# Altium PCB 100871.pcbdoc (part 2 of 2)
Units mm, origin at the board's own origin, x right, y up, seen from the top; angles counter-clockwise.
Board outline 100 x 40 mm, 2 copper layers (Top Layer, Bottom Layer), stack 1.551 mm thick; 101 components, 40 nets, 215 pads, 100 vias.
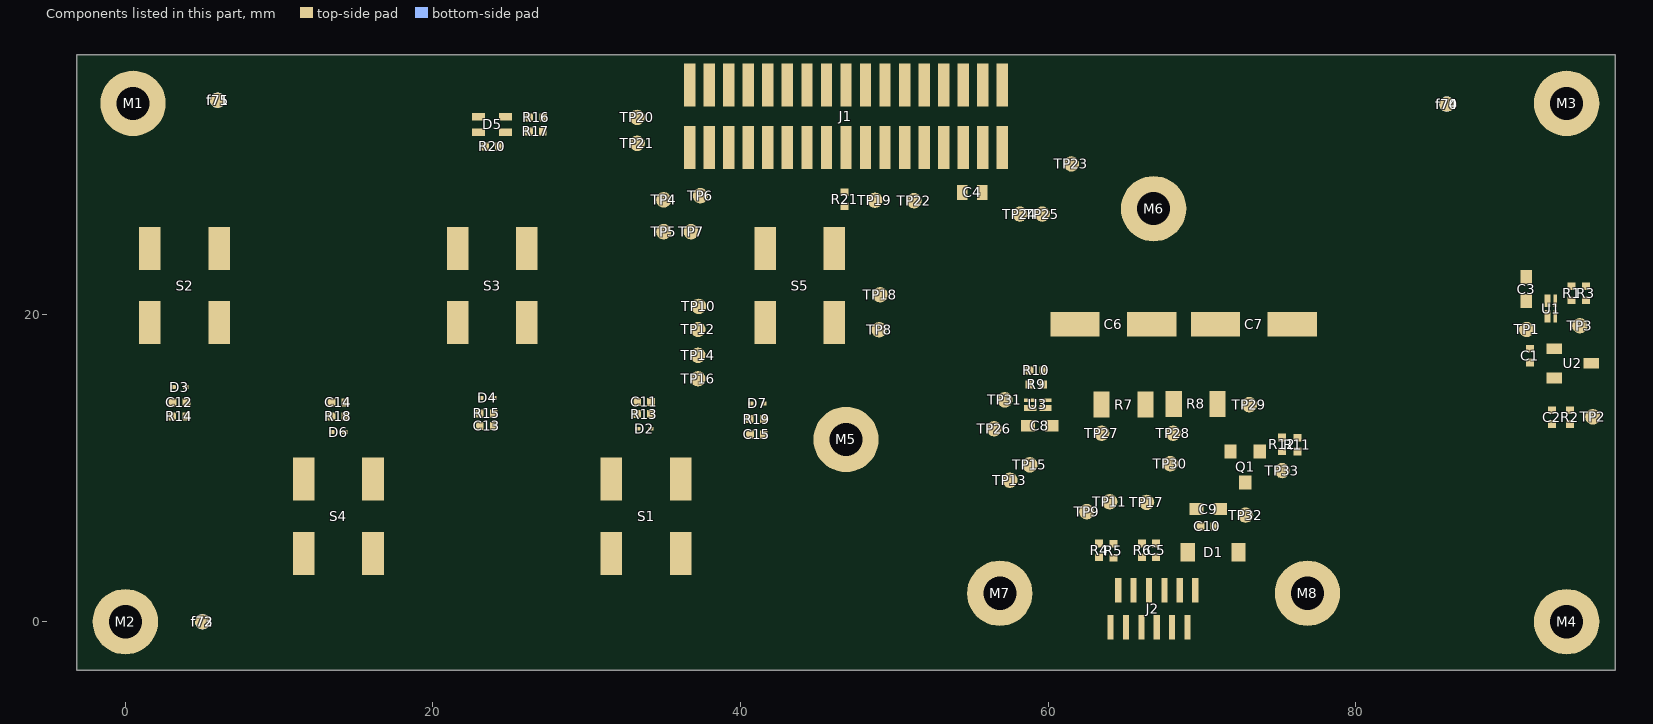
[diagram p2: the components of this part, seen from the top]

## Silkscreen, mask and mechanical layers (free items; w line width, h text height) (continued)
ASY_DWG:
  circle w0.38: c188.963,-106.972 r0.829
  lines w0.3: 199.22,-116.52 199.22,-56.52 ; 199.22,-102.52 279.22,-102.52 ; 199.22,-89.52 279.22,-89.52 ; 199.22,-76.52 279.22,-76.52 420.22,-76.52 ; 199.22,-63.52 279.22,-63.52 ; 230.22,355.48 420.22,355.48 ; 230.545,362.572 230.22,362.48 420.22,362.48 ; 230.545,377.572 230.22,377.48 420.22,377.48 ; 244.22,348.48 244.22,377.48 ; 249.22,-116.52 249.22,-56.52 ; 279.22,-116.52 279.22,-56.52 ; 279.22,-110.52 420.22,-110.52 ; 279.22,-94.52 419.22,-94.52 ; 292.22,-110.52 292.22,-94.52 ; 369.22,348.48 369.22,377.48 ; 388.22,-110.52 388.22,-94.52 ; 400.22,348.48 400.22,377.48
  lines w0.38: 174.22,-102.52 176.22,-102.52 ; 174.22,-100.52 176.22,-100.52 ; 174.22,-95.52 176.22,-95.52 ; 174.22,-93.52 176.22,-93.52 ; 175.22,-101.52 175.22,-99.52 ; 175.22,-94.52 175.22,-92.52 ; 180.22,-109.52 182.22,-109.52 ; 180.22,-107.52 182.22,-107.52 ; 181.22,-108.52 181.22,-106.52
  lines w0.508: 200.242,384.684 200.242,397.638 ; 200.242,384.684 200.242,397.638 ; 200.242,384.684 200.242,397.638 ; -370.369,8.129 -351.065,8.129 -370.369,8.129 ; -370.369,8.586 -351.065,8.586 -370.369,8.586 ; -370.369,133.528 -351.065,133.528 -370.369,133.528 ; -370.369,133.986 -351.065,133.986 -370.369,133.986 ; -370.369,258.928 -351.065,258.928 -370.369,258.928 ; -370.369,259.385 -351.065,259.385 -370.369,259.385 ; -241.133,-129.971 -241.133,-117.017 -241.133,-129.971 ; -241.133,384.684 -241.133,397.638 -241.133,384.684 ; -240.676,-129.971 -240.676,-117.017 -240.676,-129.971 ; -240.676,384.684 -240.676,397.638 -240.676,384.684 ; -130.923,-129.971 -130.923,-117.017 -130.923,-129.971 ; -130.923,384.684 -130.923,397.638 -130.923,384.684 ; -130.466,-129.971 -130.466,-117.017 -130.466,-129.971 ; -130.466,384.684 -130.466,397.638 -130.466,384.684 ; -20.687,-129.971 -20.687,-117.017 -20.687,-129.971 ; -20.687,384.684 -20.687,397.638 -20.687,384.684 ; -20.23,-129.971 -20.23,-117.017 -20.23,-129.971 ; -20.23,384.684 -20.23,397.638 -20.23,384.684 ; 89.575,384.684 89.575,397.638 89.575,384.684 ; 90.032,384.684 90.032,397.638 90.032,384.684 ; 199.785,384.684 199.785,397.638 199.785,384.684 ; 309.996,384.938 309.996,397.638 309.996,384.938 ; 310.021,-129.971 310.021,-117.017 310.021,-129.971 ; 310.453,384.684 310.453,397.638 310.453,384.684 ; 310.478,-129.971 310.478,-117.017 310.478,-129.971 ; 420.46,8.129 439.764,8.129 420.46,8.129 ; 420.46,8.586 439.764,8.586 420.46,8.586 ; 420.46,133.554 439.764,133.554 420.46,133.554 ; 420.46,134.011 439.764,134.011 420.46,134.011 ; 420.46,258.979 439.764,258.979 420.46,258.979 ; 420.46,259.436 439.764,259.436 420.46,259.436
  lines w1: -350.78,-116.52 -350.78,384.48 420.22,384.48 420.22,-116.52 -350.78,-116.52
  lines w1.1: 90.22,-129.52 90.22,-116.52 ; 104.22,-116.52 104.22,-76.52 155.22,-76.52 ; 155.22,-116.52 155.22,-76.52 ; 199.22,-129.52 199.22,-116.52 ; 230.22,348.48 230.22,384.48 ; 230.22,369.48 420.22,369.48 ; 279.22,-56.52 155.22,-56.52 155.22,-76.52
  text "1" at 363.056,388.468 h7.62
  text "6" at -188.276,388.29 h7.62
  text "5" at -77.684,388.214 h7.62
  text "7" at -298.207,388.163 h7.62
  text "4" at 31.917,388.062 h7.62
  text "3" at 142.686,388.062 h7.62
  text "2" at 252.719,388.062 h7.62
  text "REVISIONS" at 317.076,379.48 h2.54
  text "REV" at 234.784,372.48 h2.03
  text "DESCRIPTION" at 289.288,372.48 h2.03
  text "DATE" at 380.972,372.48 h2.03
  text "APRVD" at 406.16,372.48 h2.03
  text "NOTES: UNLESS OTHERWISE SPECIFIED" at -338.655,372.38 h2.03
  text "1   RoHS COMPLIANT ASSEMBLY REQUIRED. ASSEMBLE PER IPC-A-610, CLASS 2," at -338.555,365.88 h2.03
  text "01" at 235.188,364.48 h2.54
  text "INITIAL RELEASE" at 246.22,364.48 h2.54
  text "08/08/2016" at 375.06,364.48 h2.54
  text "2   AQUEOUS BASED CLEANING AFTER SOLDER FOR ALL COMPONENTS IS PREFERRED, NO-CLEAN" at -338.461,360.675 h2.03
  text "02" at 235.388,357.98 h2.54
  text "ALPHA 2 RELEASE" at 246.42,357.98 h2.54
  text "09/16/2016" at 375.26,357.98 h2.54
  text "RoHS SOLDER PROCESS IS ACCEPTABLE." at -338.605,356.53 h2.03
  text "3   ITEM IDENTIFICATION: MARK REVISION NUMBER OF THIS DRAWING IN THE SPACE PROVIDED." at -338.78,350.73 h2.03
  text "D" at 424.905,318.796 h7.62
  text "D" at -359.777,318.644 h7.62
  text "C" at 424.905,193.345 h7.62
  text "C" at -359.904,193.142 h7.62
  text "B" at -359.675,67.742 h7.62
  text "B" at 425.032,67.742 h7.62
  text "ASSEMBLY TOP" at 12.904,-16.495 h3.81
  text "A" at 424.778,-58.013 h7.62
  text "A" at -359.929,-58.14 h7.62
  text "APPROVALS" at 216.912,-61.52 h2.03
  text "DATE" at 259.972,-61.52 h2.03
  text "UNLESS OTHERWISE" at 160.964,-63.52 h2.54
  text "DESIGNER" at 200.22,-67.52 h2.03
  text "SPECIFIED" at 168.076,-68.52 h2.54
  text "DIMENSIONS ARE" at 162.996,-73.52 h2.54
  text "09/16/2016" at 254.06,-73.52 h2.54
  text "PRICE" at 202.132,-73.595 h2.54
  text "1511 Sixth Ave. Suite 300, Seattle, WA 98101 206.381.0898" at 291.308,-74.52 h2.54
  text "IN MILLIMETERS" at 162.996,-78.52 h2.54
  text "ENGINEER" at 200.22,-80.52 h2.03
  text "PRINTED CIRCUIT BOARD ASSEMBLY" at 304,-83.02 h3.81
  text "PROPRIETARY" at 112.456,-83.52 h3.81
  text "BRUEY /  CIUFFO" at 204.22,-86.52 h2.54
  text "TOLERANCES:" at 167.044,-88.52 h2.54
  text "AND" at 124.648,-89.52 h3.81
  text ".Board_Name" at 308.74,-91.562 h5.08
  text "MECH ENG" at 200.22,-93.52 h2.03
  text ".XX" at 165.724,-95.52 h2.29
  text "0.25" at 179.22,-95.52 h2.29
  text "CONFIDENTIAL" at 110.932,-96.02 h3.81
  text "SIZE" at 283.372,-97.52 h1.78
  text "DWG NO" at 294.22,-97.52 h1.78
  text "REV" at 402.084,-97.52 h1.78
  text "DAHLGREN / DONAGHY" at 204.22,-99.52 h2.54
  text "THE INFORMATION CONTAINED IN" at 112.946,-100.27 h1.52
  text ".XXX" at 163.892,-102.52 h2.29
  text "0.127" at 179.22,-102.52 h2.29
  text "THIS DRAWING IS PROPRIETARY AND" at 111.122,-103.02 h1.52
  text "RESTRICTED. ANY REPRODUCTION" at 112.946,-105.77 h1.52
  text "600-" at 309.975,-107.221 h7.62
  text ".Board_Number" at 339.675,-107.321 h7.62
  text "D" at 283.172,-107.52 h7.62
  text ".PCB_Revision" at 397.616,-108.028 h7.62
  text "IN PART OR WHOLE WITHOUT THE" at 112.946,-108.52 h1.52
  text "ANGLES" at 166.228,-109.52 h2.29
  text "5" at 185.22,-109.52 h2.29
  text "EXPRESS WRITTEN PERMISSION" at 113.912,-111.27 h1.52
  text "OF THE OWNER IS PROHIBITED" at 113.912,-114.02 h1.52
  text "SCALE:4:1" at 284.812,-114.52 h1.78
  text "SHEET 1 OF 2" at 395.676,-114.52 h1.78
  text "1" at 363.26,-126.568 h7.62
  text "6" at -188.2,-126.72 h7.62
  text "5" at -77.761,-126.72 h7.62
  text "4" at 31.688,-126.999 h7.62
  text "3" at 142.508,-127.025 h7.62
  text "2" at 252.947,-127.025 h7.62
  text "7" at -298.309,-127.584 h7.62
ASY_DWG_R:
  lines w0.3: -350.78,-110.52 -209.78,-110.52 ; -350.78,-76.52 -209.78,-76.52 ; -349.78,-94.52 -209.78,-94.52 ; -318.78,-110.52 -318.78,-94.52 ; -222.78,-110.52 -222.78,-94.52 ; -209.78,-116.52 -209.78,-56.52
  lines w0.508: -130.802,384.684 -130.802,397.638 ; -130.802,384.684 -130.802,397.638 ; -130.802,384.684 -130.802,397.638 ; -370.324,8.129 -351.02,8.129 -370.324,8.129 ; -370.324,8.586 -351.02,8.586 -370.324,8.586 ; -370.324,133.554 -351.02,133.554 -370.324,133.554 ; -370.324,134.011 -351.02,134.011 -370.324,134.011 ; -370.324,258.979 -351.02,258.979 -370.324,258.979 ; -370.324,259.436 -351.02,259.436 -370.324,259.436 ; -241.038,-129.971 -241.038,-117.017 -241.038,-129.971 ; -241.013,384.684 -241.013,397.638 -241.013,384.684 ; -240.581,-129.971 -240.581,-117.017 -240.581,-129.971 ; -240.556,384.938 -240.556,397.638 -240.556,384.938 ; -130.345,384.684 -130.345,397.638 -130.345,384.684 ; -20.592,384.684 -20.592,397.638 -20.592,384.684 ; -20.135,384.684 -20.135,397.638 -20.135,384.684 ; 89.67,-129.971 89.67,-117.017 89.67,-129.971 ; 89.67,384.684 89.67,397.638 89.67,384.684 ; 90.127,-129.971 90.127,-117.017 90.127,-129.971 ; 90.127,384.684 90.127,397.638 90.127,384.684 ; 199.906,-129.971 199.906,-117.017 199.906,-129.971 ; 199.906,384.684 199.906,397.638 199.906,384.684 ; 200.363,-129.971 200.363,-117.017 200.363,-129.971 ; 200.363,384.684 200.363,397.638 200.363,384.684 ; 310.116,-129.971 310.116,-117.017 310.116,-129.971 ; 310.116,384.684 310.116,397.638 310.116,384.684 ; 310.573,-129.971 310.573,-117.017 310.573,-129.971 ; 310.573,384.684 310.573,397.638 310.573,384.684 ; 420.505,8.129 439.809,8.129 420.505,8.129 ; 420.505,8.586 439.809,8.586 420.505,8.586 ; 420.505,133.528 439.809,133.528 420.505,133.528 ; 420.505,133.986 439.809,133.986 420.505,133.986 ; 420.505,258.928 439.809,258.928 420.505,258.928 ; 420.505,259.385 439.809,259.385 420.505,259.385
  lines w1: -350.78,-116.52 -350.78,384.48 420.22,384.48 420.22,-116.52 -350.78,-116.52
  lines w1.1: -129.78,-129.52 -129.78,-116.52 ; -20.78,-129.52 -20.78,-116.52
  text "1" at -293.616,388.468 h7.62
  text "6" at 257.716,388.29 h7.62
  text "5" at 147.124,388.214 h7.62
  text "7" at 367.647,388.163 h7.62
  text "2" at -183.279,388.062 h7.62
  text "3" at -73.246,388.062 h7.62
  text "4" at 37.523,388.062 h7.62
  text "NOTES: UNLESS OTHERWISE SPECIFIED" at 408.095,372.38 h2.03
  text "1   RoHS COMPLIANT ASSEMBLY REQUIRED. ASSEMBLE PER IPC-A-610, CLASS 2," at 407.995,365.88 h2.03
  text "2   AQUEOUS BASED CLEANING AFTER SOLDER FOR ALL COMPONENTS IS PREFERRED, NO-CLEAN" at 407.901,360.675 h2.03
  text "RoHS SOLDER PROCESS IS ACCEPTABLE." at 408.045,356.53 h2.03
  text "3   ITEM IDENTIFICATION: MARK REVISION NUMBER OF THIS DRAWING IN THE SPACE PROVIDED." at 408.22,350.73 h2.03
  text "D" at -355.465,318.796 h7.62
  text "D" at 429.217,318.644 h7.62
  text "C" at -355.465,193.345 h7.62
  text "C" at 429.344,193.142 h7.62
  text "B" at -355.592,67.742 h7.62
  text "B" at 429.115,67.742 h7.62
  text "ASSEMBLY BOTTOM" at 57.904,-16.495 h3.81
  text "A" at -355.338,-58.013 h7.62
  text "A" at 429.369,-58.14 h7.62
  text "1511 Sixth Ave. Suite 300, Seattle, WA 98101 206.381.0898" at -221.868,-74.52 h2.54
  text "PRINTED CIRCUIT BOARD ASSEMBLY" at -234.56,-83.02 h3.81
  text ".Board_Name" at -248.464,-91.295 h5.08
  text "REV" at -332.644,-97.52 h1.78
  text "DWG NO" at -224.78,-97.52 h1.78
  text "SIZE" at -213.932,-97.52 h1.78
  text "600-" at -240.535,-107.221 h7.62
  text ".Board_Number" at -270.235,-107.321 h7.62
  text "D" at -213.732,-107.52 h7.62
  text ".PCB_Revision" at -329.069,-108.042 h7.62
  text "SHEET 2 OF 2" at -326.236,-114.52 h1.78
  text "SCALE:4:1" at -215.372,-114.52 h1.78
  text "1" at -293.82,-126.568 h7.62
  text "5" at 147.201,-126.72 h7.62
  text "6" at 257.64,-126.72 h7.62
  text "4" at 37.752,-126.999 h7.62
  text "2" at -183.507,-127.025 h7.62
  text "3" at -73.068,-127.025 h7.62
  text "7" at 367.749,-127.584 h7.62
TITLEBLOCK:
  lines w0.25: -28.68,-55.02 92.32,-55.02 ; 29.82,-36.02 92.32,-36.02 92.32,-64.52 -28.68,-64.52 -28.68,-42.52 92.32,-42.52 ; 47.82,-64.52 47.82,-36.02 ; 47.82,-47.52 92.32,-47.52 ; 81.32,-55.02 81.32,-47.52
  text "PRODUCT" at 34.064,-38.52 h1.52
  text "1511 SIXTH AVENUE, THIRD FLOOR" at 48.82,-38.52 h1.52
  text "DEVELOPMENT" at 32.132,-41.52 h1.52
  text "SEATTLE,WA 98101  206.381.0898" at 48.82,-41.52 h1.52
  text "DATE" at 48.82,-44.52 h1.02
  text "09/16/2016" at 61.7,-46.02 h2.03
  text "PRINTED CIRCUIT BOARD" at -9.916,-47.02 h2.29
  text "PART NUMBER" at 48.82,-49.52 h1.02
  text "REV" at 85.596,-49.52 h1.02
  text ".Board_Name" at -22.325,-52.825 h3.81
  text "601-" at 54.475,-53.221 h2.54
  text ".Board_Number" at 64.775,-53.221 h2.54
  text ".PCB_Revision" at 84.62,-53.688 h2.54
  text "PROPRIETARY AND CONFIDENTIAL" at 53.046,-58.02 h1.52
  text "THE INFORMATION CONTAINED IN THIS DRAWING IS PROPRIETARY AND" at 51.83,-60.02 h0.76
  text "RESTRICTED. ANY REPRODUCTION IN PART OR WHOLE WITHOUT THE" at 52.742,-61.52 h0.76
  text "EXPRESS WRITTEN PERMISSION OF THE OWNER IS PROHIBITED" at 53.458,-63.02 h0.76
DXF_JULY20:
  circle w0.013: c0,0 r1.075
  circle w0.013: c0,33.7 r1.075
  circle w0.013: c93.7,0 r1.075
  circle w0.013: c93.7,33.7 r1.075
  circle w0.013: c3.85,21.85 r2
  circle w0.013: c23.85,21.85 r2
  circle w0.013: c43.85,21.85 r2
  circle w0.013: c13.85,6.85 r2
  circle w0.013: c33.85,6.85 r2
  circle w0.013: c56.85,1.85 r1.075
  circle w0.013: c76.85,1.85 r1.075
  circle w0.013: c66.85,26.85 r1.075
  circle w0.013: c46.85,11.85 r1.075
  circle w0.013: c48.002,70.408 r1.075
  circle w0.013: c68.002,85.408 r1.075
  circle w0.013: c78.002,60.408 r1.075
  circle w0.013: c58.002,60.408 r1.075
  circle w0.013: c35.002,65.408 r2
  circle w0.013: c15.002,65.408 r2
  circle w0.013: c45.002,80.408 r2
  circle w0.013: c25.002,80.408 r2
  circle w0.013: c5.002,80.408 r2
  circle w0.013: c94.852,92.258 r1.075
  circle w0.013: c94.852,58.558 r1.075
  circle w0.013: c1.152,92.258 r1.075
  circle w0.013: c1.152,58.558 r1.075
  lines w0.013: -1.998,55.408 -1.998,95.408 98.002,95.408 98.002,55.408 -1.998,55.408 ; 36.35,29.35 57.35,29.35 57.35,36.35 36.35,36.35 36.35,29.35 ; 37.502,87.908 37.502,94.908 58.502,94.908 58.502,87.908 37.502,87.908 ; 63.15,-1.15 70.55,-1.15 70.55,2.85 63.15,2.85 63.15,-1.15 ; 64.302,57.408 64.302,61.408 71.702,61.408 71.702,57.408 64.302,57.408 ; 92.35,15.1 95.85,15.1 95.85,18.6 92.35,18.6 92.35,15.1 ; 93.502,73.658 93.502,77.158 97.002,77.158 97.002,73.658 93.502,73.658
  text "M1" at 2.202,90.919 h1
  text "M3" at 92.202,90.919 h1
  text "1" at 36.675,88.036 h1
  text "J1" at 47.002,87.408 h1
  text "M6" at 69.202,83.919 h1
  text "U2" at 93.321,78.919 h1
  text "MENU" at 3.002,77.408 h1
  text "TRACKPAD" at 21.002,77.408 h1
  text "SYSTEM" at 42.002,77.408 h1
  text "3" at 96.221,75.854 h1
  text "M5" at 49.002,69.408 h1
  text "J2" at 67.002,63.408 h1
  text "TRIGGER" at 12.002,62.408 h1
  text "AUX" at 34.002,62.408 h1
  text "1" at 72.08,62.027 h1
  text "M8" at 79.475,58.468 h1
  text "M7" at 59.002,58.408 h1
  text "M2" at 2.002,57.408 h1
  text "M4" at 92.002,57.408 h1
  text "M1" at 1.45,33.25 h1
  text "M3" at 90.25,33.25 h1
  text "1" at 35.523,29.478 h1
  text "J1" at 45.85,28.85 h1
  text "M6" at 68.7,26.5 h1
  text "MENU" at 2.4,24.6 h1
  text "TRACKPAD" at 20.3,24.5 h1
  text "SYSTEM" at 41.3,24.3 h1
  text "U2" at 92.169,20.361 h1
  text "3" at 95.069,17.296 h1
  text "M5" at 48.4,11.5 h1
  text "J2" at 66.05,3.65 h1
  text "AUX" at 32.9,3.579 h1
  text "1" at 70.928,3.469 h1
  text "TRIGGER" at 10.8,3.3 h1
  text "M8" at 78.324,-0.09 h1
  text "M7" at 57.85,-0.15 h1
  text "M4" at 90.25,-0.45 h1
  text "M2" at 1.45,-0.65 h1
Drill Drawing:
  lines w0.254: 120.209,19.967 120.633,19.967 120.633,19.543 121.479,19.543 121.479,19.967 121.903,19.967 121.903,20.813 121.479,20.813 121.479,21.237 120.633,21.237 120.633,20.813 120.209,20.813 120.209,19.967 ; 120.209,23.777 120.633,23.777 121.056,23.353 121.479,23.777 121.903,23.777 121.479,24.2 121.903,24.623 121.479,24.623 121.056,25.047 120.633,24.623 120.209,24.623 120.633,24.2 120.209,23.777
  lines w0.381: 118.69,18.4 339.406,18.4 ; 118.69,26.02 339.406,26.02 ; 132.683,14.59 132.683,29.83 ; 147.665,14.59 147.665,29.83 ; 175.343,14.59 175.343,29.83 ; 188.192,14.59 188.192,29.83 ; 206.831,14.59 206.831,29.83 ; 244.919,14.59 244.919,29.83 ; 259.901,14.59 259.901,29.83 ; 278.845,14.59 278.845,29.83 ; 310.585,14.59 310.585,29.83 ; 118.69,14.59 339.406,14.59 339.406,29.83 118.69,29.83 118.69,14.59
  text "Symbol" at 120.976,27.163 h1.83
  text "Count" at 133.826,27.163 h1.83
  text "Hole Size" at 148.808,27.163 h1.83
  text "Plated" at 176.486,27.163 h1.83
  text "Hole Type" at 189.335,27.163 h1.83
  text "Drill Layer Pair" at 207.974,27.163 h1.83
  text "Via/Pad" at 246.062,27.163 h1.83
  text "Pad Shape" at 261.044,27.163 h1.83
  text "Template" at 279.988,27.163 h1.83
  text "Hole Tolerance" at 311.728,27.163 h1.83
  text "100" at 133.826,23.353 h1.52
  text "0.250mm (9.84mil)" at 148.808,23.353 h1.52
  text "PTH" at 176.486,23.353 h1.52
  text "Round" at 189.335,23.353 h1.52
  text "Top Layer - Bottom Layer" at 207.974,23.353 h1.52
  text "Via" at 246.062,23.353 h1.52
  text "Rounded" at 261.044,23.353 h1.52
  text "v50h25m0mx0(Tol0-25)" at 279.988,23.353 h1.52
  text "+0.000mm/-0.250mm" at 311.728,23.353 h1.52
  text "8" at 133.826,19.543 h1.52
  text "2.150mm (84.65mil)" at 148.808,19.543 h1.52
  text "PTH" at 176.486,19.543 h1.52
  text "Round" at 189.335,19.543 h1.52
  text "Top Layer - Bottom Layer" at 207.974,19.543 h1.52
  text "Pad" at 246.062,19.543 h1.52
  text "Rounded" at 261.044,19.543 h1.52
  text "c425h215(Tol8-8)" at 279.988,19.543 h1.52
  text "+/-0.076mm" at 311.728,19.543 h1.52
  text "108 Total" at 133.826,15.733 h1.52
  text ".Layer_Name" at 18.431,-16.192 h3.81

## Dimensions
-3.15,36.85 to -3.15,-3.15 on FAB_DWG
-3.15,36.85 to 96.85,36.85 on FAB_DWG

## Text inside footprints (layer, text, board x,y; h text height)
C4: TOP_COURTYARD "A" at 55.606,28.054 h0.3 r180; TOP_COURTYARD "C" at 54.706,28.079 h0.3 r180
D1: Mechanical 32 "C" at 68.712,4.206 h0.64; Mechanical 32 "A" at 72.062,4.256 h0.64
D2: Mechanical 32 "C" at 32.481,12.229 h0.64; Mechanical 32 "A" at 34.485,12.221 h0.64
D3: Mechanical 32 "C" at 2.275,14.944 h0.64; Mechanical 32 "A" at 4.28,14.935 h0.64
D4: Mechanical 32 "C" at 22.269,14.236 h0.64; Mechanical 32 "A" at 24.274,14.228 h0.64
D6: Mechanical 32 "C" at 12.605,12.015 h0.64; Mechanical 32 "A" at 14.61,12.007 h0.64
D7: Mechanical 32 "C" at 39.825,13.881 h0.64; Mechanical 32 "A" at 41.83,13.873 h0.64
J1: Top Overlay "1" at 35.523,29.478 h0.76
M1: Mechanical 18 "1" at -1.271,33.711 h0.64
M2: Mechanical 18 "1" at -1.771,0.011 h0.64
M3: Mechanical 18 "1" at 91.929,33.711 h0.64
M4: Mechanical 18 "1" at 91.929,0.011 h0.64
M5: Mechanical 18 "1" at 45.079,11.861 h0.64
M6: Mechanical 18 "1" at 65.079,26.861 h0.64
M7: Mechanical 18 "1" at 55.079,1.861 h0.64
M8: Mechanical 18 "1" at 75.079,1.861 h0.64
Q1: Mechanical 30 "D" at 72.95,10.323 h0.64 r180; Mechanical 30 "S" at 72.05,10.473 h0.64 r180; Mechanical 30 "G" at 73.95,10.473 h0.64 r180
U2: Mechanical 30 "S" at 93.542,16.026 h0.64 r270; Mechanical 30 "G" at 93.542,17.976 h0.64 r270; Mechanical 30 "D" at 93.992,17.001 h0.64 r270